# Altium PCB Extender_Remastered_V1.PcbDoc (part 1 of 2)
Units mm, origin at the board's own origin, x right, y up, seen from the top; angles counter-clockwise.
Board outline 188 x 60 mm, 2 copper layers (Top Layer, Bottom Layer); 132 components, 144 nets, 525 pads, 128 vias.
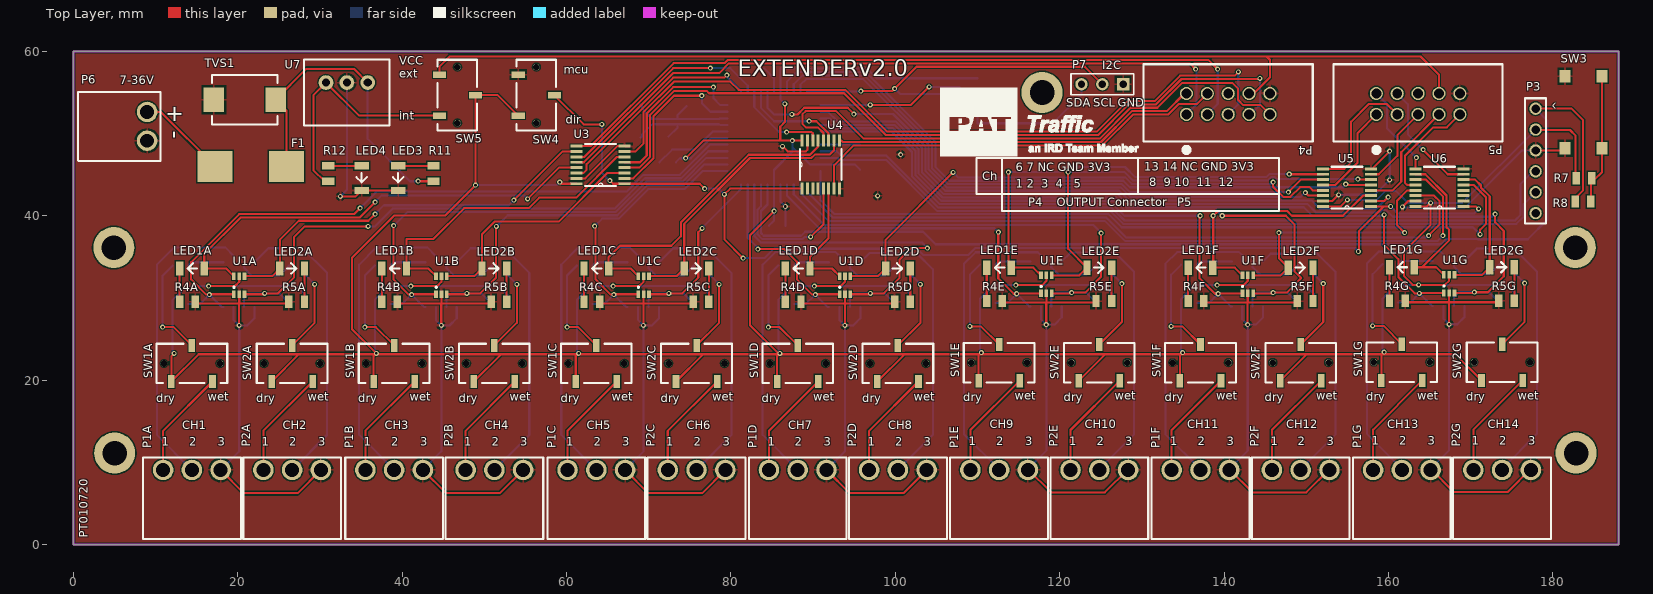
[diagram p0: Top Layer view]
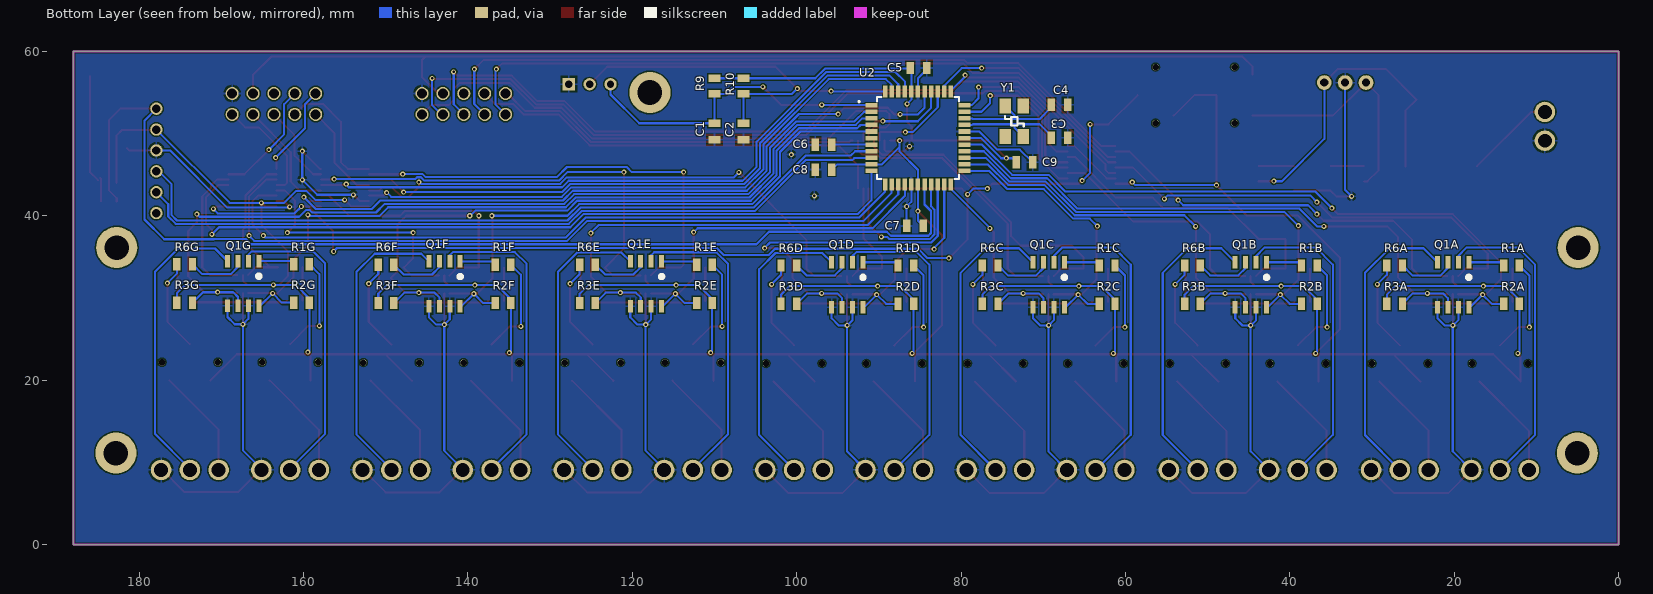
[diagram p1: Bottom Layer view, seen from below]
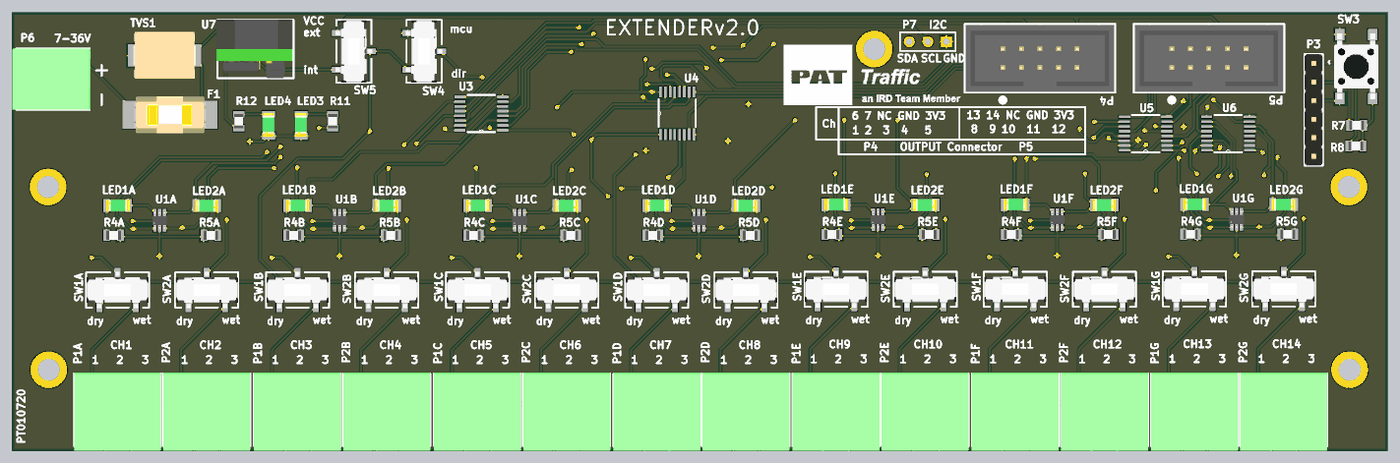
[diagram p3: 3D render of the assembled board from above, using the file's embedded part models]
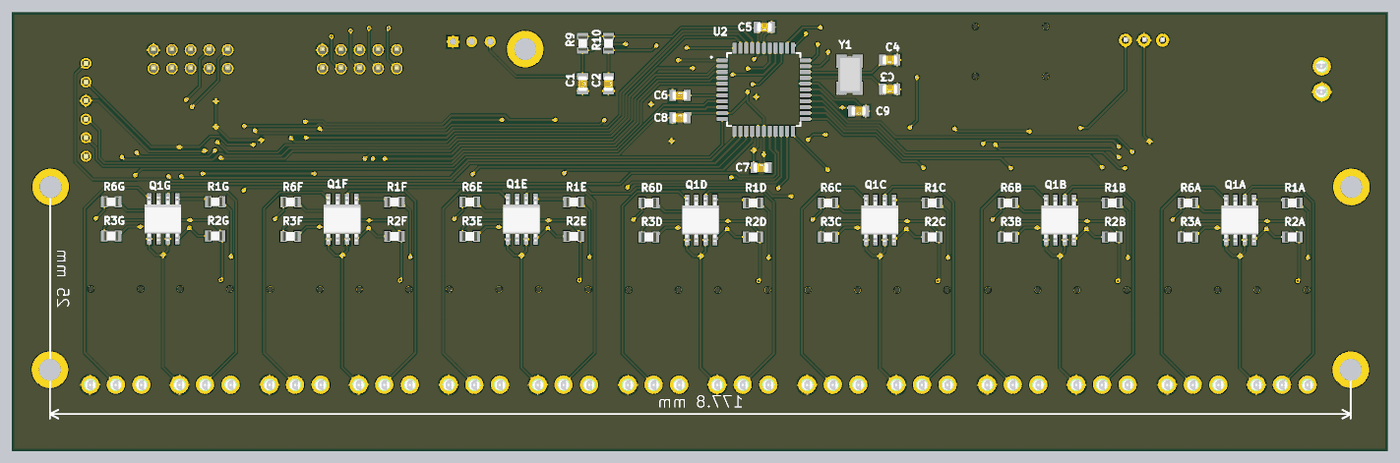
[diagram p4: 3D render of the assembled board from below, using the file's embedded part models]

## Layer stack, top to bottom
Top Solder: solder mask 0.0102, Solder Resist, Dk 3.5
Top Layer: signal copper 0.0356
Dielectric 1: dielectric 0.32, FR-4, Dk 4.8
Bottom Layer: signal copper 0.0356
Bottom Solder: solder mask 0.0102, Solder Resist, Dk 3.5

## Board outline
0,0 188,0 188,60 0,60

## Design rules (kind name [scope] priority, off if disabled: settings)
Clearance [All] p1: gap=0.152
HoleSize [All] p1: absolutevalues=TRUE maxlimit=6.3 minlimit=0.3 maxpercent=80.000 minpercent=20.000
MinimumAnnularRing [All] p1: minimumring=0.152
MinimumSolderMaskSliver [All] p1: minsoldermaskwidth=0.1
PolygonConnect [All] p1: connectstyle=Relief reliefconductorwidth=0.254 reliefentries=4 polygonreliefangle="90 Angle" airgapwidth=0.254
RoutingVias [All] p1: holewidth=0.305 width=0.508 viastyle="Through Hole" minholewidth=0.3 minwidth=0.45 maxholewidth=6.3 maxwidth=6.45
SilkToSilkClearance [All] p1: silktosilkclearance=0.152
SilkToSolderMaskClearance [IsPad] p1: minsilkscreentomaskgap=0.1 clearancetoexposedcopper=TRUE
SolderMaskExpansion [All] p1: expansion=0.102
Width [All] p1: maxlimit=1 minlimit=0.152 preferedwidth=0.254
26 further rules are at their usual default settings.

## Classes and differential pairs
net class INB[1..7]: INB1 INB2 INB3 INB4 INB5 INB6 INB7
net class IN_INVB[1..7]: IN_INVB1 IN_INVB2 IN_INVB3 IN_INVB4 IN_INVB5 IN_INVB6 IN_INVB7
net class IN_INVA[1..7]: IN_INVA1 IN_INVA2 IN_INVA3 IN_INVA4 IN_INVA5 IN_INVA6 IN_INVA7
net class INB_MCU[1..7]: INB_MCU1 INB_MCU2 INB_MCU3 INB_MCU4 INB_MCU5 INB_MCU6 INB_MCU7
net class INA_MCU[1..7]: INA_MCU1 INA_MCU2 INA_MCU3 INA_MCU4 INA_MCU5 INA_MCU6 INA_MCU7
net class INA[1..7]: INA1 INA2 INA3 INA4 INA5 INA6 INA7
channel class Dual_opto_input: D_IN1 D_IN2 D_IN3 D_IN4 D_IN5 D_IN6 D_IN7
component class PWR_source: F1 LED3 LED4 P6 R11 R12 SW5 TVS1 U7
component class OUT_CONN: P4 P5 SW4 U3 U4 U5 U6
component class MCU: C1 C2 C3 C4 C5 C6 C7 C8 C9 P3 P7 R7 R8 R9 R10 SW3 U2 Y1
component class D_IN7: LED1G LED2G P1G P2G Q1G R1G R2G R3G R4G R5G R6G SW1G SW2G U1G
component class D_IN6: LED1F LED2F P1F P2F Q1F R1F R2F R3F R4F R5F R6F SW1F SW2F U1F
component class D_IN5: LED1E LED2E P1E P2E Q1E R1E R2E R3E R4E R5E R6E SW1E SW2E U1E
component class D_IN4: LED1D LED2D P1D P2D Q1D R1D R2D R3D R4D R5D R6D SW1D SW2D U1D
component class D_IN3: LED1C LED2C P1C P2C Q1C R1C R2C R3C R4C R5C R6C SW1C SW2C U1C
component class D_IN2: LED1B LED2B P1B P2B Q1B R1B R2B R3B R4B R5B R6B SW1B SW2B U1B
component class D_IN1: LED1A LED2A P1A P2A Q1A R1A R2A R3A R4A R5A R6A SW1A SW2A U1A

## Components (designator, comment, footprint, x,y, rotation, side; value= is the part's Value field where it differs from the comment)
C1 "51pF" Capacitor0805 110,50.25 r270 bottom
C2 "51pF" Capacitor0805 106.475,50.25 r270 bottom
C3 "CapacitorSMD" Capacitor0805 68.018,49.499 r0 bottom
C4 "CapacitorSMD" Capacitor0805 68.018,53.499 r0 bottom
C5 "CapacitorSMD" Capacitor0805 85.175,57.975 r0 bottom
C6 "CapacitorSMD" Capacitor0805 96.718,48.649 r180 bottom
C7 "CapacitorSMD" Capacitor0805 85.618,38.774 r180 bottom
C8 "CapacitorSMD" Capacitor0805 96.718,45.599 r180 bottom
C9 "CapacitorSMD" Capacitor0805 72.293,46.499 r0 bottom
F1 "Fuse" FUSEBLOCKSMD 21.6,46 r0 top
LED1A "IN1" SMD1206 14.425,33.586 r180 top (schematic designator LED1)
LED1B "IN1" SMD1206 39.025,33.586 r180 top (schematic designator LED1)
LED1C "IN1" SMD1206 63.625,33.586 r180 top (schematic designator LED1)
LED1D "IN1" SMD1206 88.125,33.586 r180 top (schematic designator LED1)
LED1E "IN1" SMD1206 112.625,33.686 r180 top (schematic designator LED1)
LED1F "IN1" SMD1206 137.125,33.686 r180 top (schematic designator LED1)
LED1G "IN1" SMD1206 161.625,33.732 r180 top (schematic designator LED1)
LED2A "IN2" SMD1206 26.617,33.586 r0 top (schematic designator LED2)
LED2B "IN2" SMD1206 51.217,33.586 r0 top (schematic designator LED2)
LED2C "IN2" SMD1206 75.817,33.586 r0 top (schematic designator LED2)
LED2D "IN2" SMD1206 100.317,33.586 r0 top (schematic designator LED2)
LED2E "IN2" SMD1206 124.817,33.686 r0 top (schematic designator LED2)
LED2F "IN2" SMD1206 149.317,33.686 r0 top (schematic designator LED2)
LED2G "IN2" SMD1206 173.817,33.732 r0 top (schematic designator LED2)
LED3 "Power" SMD1206 39.508,44.575 r270 top
LED4 "+3.3V" SMD1206 35.067,44.575 r270 top
P1A "IN1" TBHDR3P3.5 14.425,9.075 r180 top (schematic designator P1)
P1B "IN1" TBHDR3P3.5 39.025,9.075 r180 top (schematic designator P1)
P1C "IN1" TBHDR3P3.5 63.625,9.075 r180 top (schematic designator P1)
P1D "IN1" TBHDR3P3.5 88.125,9.075 r180 top (schematic designator P1)
P1E "IN1" TBHDR3P3.5 112.625,9.075 r180 top (schematic designator P1)
P1F "IN1" TBHDR3P3.5 137.125,9.075 r180 top (schematic designator P1)
P1G "IN1" TBHDR3P3.5 161.625,9.075 r180 top (schematic designator P1)
P2A "IN2" TBHDR3P3.5 26.617,9.075 r180 top (schematic designator P2)
P2B "IN2" TBHDR3P3.5 51.217,9.075 r180 top (schematic designator P2)
P2C "IN2" TBHDR3P3.5 75.817,9.075 r180 top (schematic designator P2)
P2D "IN2" TBHDR3P3.5 100.317,9.075 r180 top (schematic designator P2)
P2E "IN2" TBHDR3P3.5 124.817,9.075 r180 top (schematic designator P2)
P2F "IN2" TBHDR3P3.5 149.317,9.075 r180 top (schematic designator P2)
P2G "IN2" TBHDR3P3.5 173.817,9.075 r180 top (schematic designator P2)
P3 "ICSP" MALE6PIN 177.9,46.675 r270 top
P4 "CON5x2" TBBTB2x5 140.5,53.6 r0 top
P5 "CON5x2" TBBTB2x5 163.6,53.6 r0 top
P6 "DC" TBHDR2P3.5 8.975,50.875 r90 top
P7 "Header 3" HDR1X3 127.725,56 r180 top
Q1A "MOCD217" SOIC8 20.14,31.614 r270 bottom (schematic designator Q1)
Q1B "MOCD217" SOIC8 44.74,31.614 r270 bottom (schematic designator Q1)
Q1C "MOCD217" SOIC8 69.34,31.614 r270 bottom (schematic designator Q1)
Q1D "MOCD217" SOIC8 93.84,31.614 r270 bottom (schematic designator Q1)
Q1E "MOCD217" SOIC8 118.34,31.714 r270 bottom (schematic designator Q1)
Q1F "MOCD217" SOIC8 142.84,31.714 r270 bottom (schematic designator Q1)
Q1G "MOCD217" SOIC8 167.34,31.76 r270 bottom (schematic designator Q1)
R1A "680" ResistorSMD0805 13.028,33.952 r180 bottom (schematic designator R1)
R1B "680" ResistorSMD0805 37.628,33.952 r180 bottom (schematic designator R1)
R1C "680" ResistorSMD0805 62.228,33.952 r180 bottom (schematic designator R1)
R1D "680" ResistorSMD0805 86.728,33.952 r180 bottom (schematic designator R1)
R1E "680" ResistorSMD0805 111.228,34.052 r180 bottom (schematic designator R1)
R1F "680" ResistorSMD0805 135.728,34.052 r180 bottom (schematic designator R1)
R1G "680" ResistorSMD0805 160.228,34.098 r180 bottom (schematic designator R1)
R2A "680" ResistorSMD0805 13.028,29.277 r0 bottom (schematic designator R2)
R2B "680" ResistorSMD0805 37.628,29.277 r0 bottom (schematic designator R2)
R2C "680" ResistorSMD0805 62.228,29.277 r0 bottom (schematic designator R2)
R2D "680" ResistorSMD0805 86.728,29.277 r0 bottom (schematic designator R2)
R2E "680" ResistorSMD0805 111.228,29.377 r0 bottom (schematic designator R2)
R2F "680" ResistorSMD0805 135.728,29.377 r0 bottom (schematic designator R2)
R2G "680" ResistorSMD0805 160.228,29.423 r0 bottom (schematic designator R2)
R3A "680" ResistorSMD0805 27.252,29.277 r180 bottom (schematic designator R3)
R3B "680" ResistorSMD0805 51.852,29.277 r180 bottom (schematic designator R3)
R3C "680" ResistorSMD0805 76.452,29.277 r180 bottom (schematic designator R3)
R3D "680" ResistorSMD0805 100.952,29.277 r180 bottom (schematic designator R3)
R3E "680" ResistorSMD0805 125.452,29.377 r180 bottom (schematic designator R3)
R3F "680" ResistorSMD0805 149.952,29.377 r180 bottom (schematic designator R3)
R3G "680" ResistorSMD0805 174.452,29.423 r180 bottom (schematic designator R3)
R4A "240" ResistorSMD0805 13.875,29.522 r180 top (schematic designator R4)
R4B "240" ResistorSMD0805 38.475,29.522 r180 top (schematic designator R4)
R4C "240" ResistorSMD0805 63.075,29.522 r180 top (schematic designator R4)
R4D "240" ResistorSMD0805 87.575,29.522 r180 top (schematic designator R4)
R4E "240" ResistorSMD0805 112.075,29.622 r180 top (schematic designator R4)
R4F "240" ResistorSMD0805 136.575,29.622 r180 top (schematic designator R4)
R4G "240" ResistorSMD0805 161.075,29.668 r180 top (schematic designator R4)
R5A "240" ResistorSMD0805 27.167,29.522 r0 top (schematic designator R5)
R5B "240" ResistorSMD0805 51.767,29.522 r0 top (schematic designator R5)
R5C "240" ResistorSMD0805 76.367,29.522 r0 top (schematic designator R5)
R5D "240" ResistorSMD0805 100.867,29.522 r0 top (schematic designator R5)
R5E "240" ResistorSMD0805 125.367,29.622 r0 top (schematic designator R5)
R5F "240" ResistorSMD0805 149.867,29.622 r0 top (schematic designator R5)
R5G "240" ResistorSMD0805 174.367,29.668 r0 top (schematic designator R5)
R6A "680" ResistorSMD0805 27.252,33.952 r0 bottom (schematic designator R6)
R6B "680" ResistorSMD0805 51.852,33.952 r0 bottom (schematic designator R6)
R6C "680" ResistorSMD0805 76.452,33.952 r0 bottom (schematic designator R6)
R6D "680" ResistorSMD0805 100.952,33.952 r0 bottom (schematic designator R6)
R6E "680" ResistorSMD0805 125.452,34.052 r0 bottom (schematic designator R6)
R6F "680" ResistorSMD0805 149.952,34.052 r0 bottom (schematic designator R6)
R6G "680" ResistorSMD0805 174.452,34.098 r0 bottom (schematic designator R6)
R7 "10k" ResistorSMD0805 183.775,44.575 r180 top
R8 "470" ResistorSMD0805 183.675,41.725 r180 top
R9 "4.7k" ResistorSMD0805 110,55.775 r90 bottom
R10 "4.7k" ResistorSMD0805 106.475,55.775 r90 bottom
R11 "4.7k" ResistorSMD0805 43.825,45.125 r270 top
R12 "240" ResistorSMD0805 31,45.125 r270 top
SW1A "SPDT" "SPDT SMD" 14.425,22.029 r0 top (schematic designator SW1)
SW1B "SPDT" "SPDT SMD" 39.025,22.029 r0 top (schematic designator SW1)
SW1C "SPDT" "SPDT SMD" 63.625,22.029 r0 top (schematic designator SW1)
SW1D "SPDT" "SPDT SMD" 88.125,22.029 r0 top (schematic designator SW1)
SW1E "SPDT" "SPDT SMD" 112.625,22.129 r0 top (schematic designator SW1)
SW1F "SPDT" "SPDT SMD" 137.125,22.129 r0 top (schematic designator SW1)
SW1G "SPDT" "SPDT SMD" 161.625,22.175 r0 top (schematic designator SW1)
SW2A "SPDT" "SPDT SMD" 26.617,22.029 r0 top (schematic designator SW2)
SW2B "SPDT" "SPDT SMD" 51.217,22.029 r0 top (schematic designator SW2)
SW2C "SPDT" "SPDT SMD" 75.817,22.029 r0 top (schematic designator SW2)
SW2D "SPDT" "SPDT SMD" 100.317,22.029 r0 top (schematic designator SW2)
SW2E "SPDT" "SPDT SMD" 124.817,22.129 r0 top (schematic designator SW2)
SW2F "SPDT" "SPDT SMD" 149.317,22.129 r0 top (schematic designator SW2)
SW2G "SPDT" "SPDT SMD" 173.817,22.175 r0 top (schematic designator SW2)
SW3 "Tactile Switch" TactileSwitch 183.725,52.6 r90 top
SW4 "SPDT" "SPDT SMD" 56.325,54.675 r270 top
SW5 "SPDT" "SPDT SMD" 46.725,54.675 r270 top
TVS1 "30VDC" Varistor 20.85,54.125 r270 top
U1A "Inverter2x2" Inverter2x2 20.18,31.554 r90 top (schematic designator U1)
U1B "Inverter2x2" Inverter2x2 44.78,31.554 r90 top (schematic designator U1)
U1C "Inverter2x2" Inverter2x2 69.38,31.554 r90 top (schematic designator U1)
U1D "Inverter2x2" Inverter2x2 93.88,31.554 r90 top (schematic designator U1)
U1E "Inverter2x2" Inverter2x2 118.38,31.654 r90 top (schematic designator U1)
U1F "Inverter2x2" Inverter2x2 142.88,31.654 r90 top (schematic designator U1)
U1G "Inverter2x2" Inverter2x2 167.38,31.7 r90 top (schematic designator U1)
U2 "PIC24FJ128GB204-I/PT" QFP80P1200X1200X120-44N 85.243,49.449 r180 bottom
U3 "SN74CBTLV3257PWR" SOP65P640X120-16N 64.15,46.175 r180 top
U4 "SN74CBTLV3257PWR" SOP65P640X120-16N 90.925,46.225 r90 top
U5 "SN74CBTLV3257PWR" SOP65P640X120-16N 154.95,43.425 r180 top
U6 "SN74CBTLV3257PWR" SOP65P640X120-16N 166.225,43.425 r180 top
U7 "Regulator 3.3V" OKI78SR 33.275,56.2 r270 top
Y1 "Crystal" CRYSTALSMDMini 73.518,51.499 r90 bottom

## Footprints (in the part's own frame and the unit in brackets; to place one, negate y for a bottom-side part, rotate by r counter-clockwise, add the part's x,y. Pads: shape width x height; smd on the part's side, far side on the other; paste and mask are expansions set on the pad)
Capacitor0805 [mm]
  rect 0.9x1.5 smd: 1(-1,0) 2(1,0)
  body extent -1.02,-0.63 0.98,0.62, height 0.78
CRYSTALSMDMini [mm]
  rect 1.8x1.4 smd: 1(-1.85,-1.1) 2(1.85,1.1) ""(-1.85,1.1) ""(1.85,-1.1)
  silkscreen extent -0.64,-1.14 0.64,1.14, body extent -2.5,-1.65 2.5,1.55, height 0.9
FUSEBLOCKSMD [mm] "Fuse Block Cartridge SMD"
  rect 4.24x3.81 smd: 1(-4.35,0) 2(4.35,0)
  body extent -4.91,-2.51 4.92,2.52, height 3.81
HDR1X3 [mm] "Connector; Header; 3 Position"
  rect 1.5x1.5 hole 0.9: 1(0,0)
  round 1.5 hole 0.9: 2(2.54,0) 3(5.08,0)
  silkscreen extent -1.27,-1.27 6.35,1.27
Inverter2x2 [mm] "Inversor Lógico 2E2S"
  rect 0.9x0.45 smd: 1(-1.1,0.65) 2(-1.1,0) 3(-1.1,-0.65) 4(1.1,-0.65) 5(1.1,0) 6(1.1,0.65)
  silkscreen extent -0.35,0.54 -0.15,0.73, body extent -1.1,-1 1.1,1, height 1.1
MALE6PIN [mm]
  round 1.5 hole 1.02: 1(-6.35,0) 2(-3.81,0) 3(-1.27,0) 4(1.27,0) 5(3.81,0) 6(6.35,0)
  silkscreen extent -7.62,-1.27 7.62,1.27, body extent -7.62,-1.24 7.62,1.25, height 8.54
OKI78SR [mm] "Regulator DC-DC 3.3V 1.5A"
  round 1.8 hole 1: 1(0,2.54) 2(0,0) 3(0,-2.54)
  silkscreen extent -2.79,-5.2 5.21,5.2, body extent -2.87,-5.33 5.21,5.07, height 16.5
QFP80P1200X1200X120-44N [mm]
  rect 1.47x0.55 smd: 1(-5.67,4) 2(-5.67,3.2) 3(-5.67,2.4) 4(-5.67,1.6) 5(-5.67,0.8) 6(-5.67,0) 7(-5.67,-0.8) 8(-5.67,-1.6) 9(-5.67,-2.4) 10(-5.67,-3.2) 11(-5.67,-4) 23(5.67,-4) 24(5.67,-3.2) 25(5.67,-2.4) 26(5.67,-1.6) 27(5.67,-0.8) 28(5.67,0) 29(5.67,0.8) 30(5.67,1.6) 31(5.67,2.4) 32(5.67,3.2) 33(5.67,4)
  rect 0.55x1.47 smd: 12(-4,-5.67) 13(-3.2,-5.67) 14(-2.4,-5.67) 15(-1.6,-5.67) 16(-0.8,-5.67) 17(0,-5.67) 18(0.8,-5.67) 19(1.6,-5.67) 20(2.4,-5.67) 21(3.2,-5.67) 22(4,-5.67) 34(4,5.67) 35(3.2,5.67) 36(2.4,5.67) 37(1.6,5.67) 38(0.8,5.67) 39(0,5.67) 40(-0.8,5.67) 41(-1.6,5.67) 42(-2.4,5.67) 43(-3.2,5.67) 44(-4,5.67)
  silkscreen extent -7.26,-5 5,5
ResistorSMD0805 [mm]
  rect 0.9x1.5 smd: 1(-0.95,0) 2(0.95,0)
  body extent -1,-0.63 1,0.63, height 0.43
SMD1206 [mm]
  rect 0.9x1.75 smd: 1(1.5,0) 2(-1.5,0)
  silkscreen extent -0.64,-0.64 0.51,0.64, body extent -1.65,-0.84 1.55,0.76, height 1.11
SOIC8 [mm]
  rect 1.52x0.61 smd: 1(-2.732,1.905) 2(-2.732,0.635) 3(-2.732,-0.635) 4(-2.732,-1.905) 5(2.732,-1.905) 6(2.732,-0.635) 7(2.732,0.635) 8(2.732,1.905)
  silkscreen extent -1.09,1.71 -0.69,2.1, body extent -3,-2.54 3,2.46, height 3.33
SOP65P640X120-16N [mil]
  rect 58x14 smd: 1(-115,90) 2(-115,64) 3(-115,38) 4(-115,13) 5(-115,-13) 6(-115,-38) 7(-115,-64) 8(-115,-90) 9(115,-90) 10(115,-64) 11(115,-38) 12(115,-13) 13(115,13) 14(115,38) 15(115,64) 16(115,90)
  silkscreen extent -74,-100 74,100
"SPDT SMD" [mm]
  rect 0.8x1.6 smd: 1(-2.5,-2.2) 2(0,2.2) 3(2.5,-2.2)
  round 0.8 hole 0.8: ""(-3.4,0) ""(3.4,0)
  silkscreen extent -4.3,-2.4 4.3,2.4, body extent -4.25,-2.5 4.25,2.5, height 5.5
TactileSwitch [mm]
  rect 1.55x1.3 smd: 1(-4.375,2.25) 2(4.375,2.25) 3(-4.375,-2.25) 4(4.375,-2.25)
  body extent -4.5,-3 4.5,3, height 4.3
TBBTB2x5 [mm] "Board to Board 2x5 Pitch 2.54mm"
  round 1.6 hole 1.2: 1(-5.08,-1.27) 2(-5.08,1.27) 3(-2.54,-1.27) 4(-2.54,1.27) 5(0,-1.27) 6(0,1.27) 7(2.54,-1.27) 8(2.54,1.27) 9(5.08,-1.27) 10(5.08,1.27)
  silkscreen extent -10.29,-5.89 10.29,4.83, body extent -10.16,-4.42 10.16,4.68, height 9
TBHDR2P3.5 [mm] "Connector Green 2 positions with pitch 3.5mm"
  round 2.5 hole 1.7: 1(-1.75,0) 2(1.75,0)
  silkscreen extent -4.2,-1.65 4.2,8.4, body extent -4.2,-1.78 4.2,8.92, height 7.05
TBHDR3P3.5 [mm] "Connector Green 3 positions with pitch 3.5mm"
  round 2.5 hole 1.7: 1(-3.5,0) 2(0,0) 3(3.5,0)
  silkscreen extent -5.95,-1.52 5.95,8.4, body extent -5.95,-1.65 5.95,9.05, height 7.1
Varistor [mm]
  rect 3x2.5 smd: 1(0,3.75) 2(0,-3.75)
  silkscreen extent -3,-4 3,4, body extent -3.2,-4.25 3.2,4.25, height 3.51

## Part data
C1 C2: library part CapacitorSMD, "Ceramic Capacitor"
C3 C4 C5 C6 C7 C8 C9: "Ceramic Capacitor"
F1: "Fuse 6x25mm"
LED1A LED1B LED1C LED1D LED1E LED1F LED1G LED2A LED2B LED2C LED2D LED2E LED2F LED2G: library part LedSMD, "Discrete Led SMD"
LED3 LED4: library part LedSMD, "Discrete Led SMD 1205 Green"
P1A P1B P1C P1D P1E P1F P1G P2A P2B P2C P2D P2E P2F P2G: library part TBHDR3P3.5, "Connector 3 positions with pitch 3.5mm"
P3: library part PHM1x6P2.54, "Pin Header Male 6 Pins Pitch 2.54mm"
P4 P5: library part PH_5x2
P6: library part TBHDR2P3.5, "Connector 2 positions with pitch 3.5mm"
P7: "Header, 3-Pin"
Q1A Q1B Q1C Q1D Q1E Q1F Q1G: "Optocoupler"
R1A R1B R1C R1D R1E R1F R1G R2A R2B R2C R2D R2E R2F R2G R3A R3B R3C R3D R3E R3F R3G R4A R4B R4C R4D R4E R4F R4G R5A R5B R5C R5D R5E R5F R5G R6A R6B R6C R6D R6E R6F R6G R7 R8 R9 R10 R11 R12: library part ResistorSMD, "Chip Resistor SMD"
SW1A SW1B SW1C SW1D SW1E SW1F SW1G SW2A SW2B SW2C SW2D SW2E SW2F SW2G SW4 SW5: library part SW_SPDT, "200mA 12V"
SW3: "Switch Contact"
TVS1: library part Varistor, "Varistor SMD"
U1A U1B U1C U1D U1E U1F U1G: "Logic Inverter 2 Circuits"
U2: "128KB Flash, 8KB RAM, 16 MIPS, USB OTG, Crypto, 44 TQFP 10x10x1mm TRAY"
U3 U4 U5 U6: "Multiplexer/Demultiplexer 4 x 1:2 16-TSSOP"
U7: library part OKI78SR, "Regulator DC-DC 3.3V 1.5A"
Y1: "Crystal SMD"

## Free pads (board coordinates)
  round 5 hole 3: ""(4.925,36.125) ""(5.025,11.125) ""(117.856,54.991) ""(182.725,36.125) ""(182.825,11.125)

## Via types
v1: diameter 0.61, hole 0.305, Top Layer to Bottom Layer, 128 vias

## Nets (pads, with @x,y where several pads share a name; then routed paths per layer and width w, separated by ;. In a path a pad name is that pad's centre, name@x,y a point inside that pad or via, vN(x,y) a via of type N, cw(c..) or ccw(c..) an arc to the next point about the centre after c; other vN are vias at no path point)
3V3: R12.2 SW5.3 U7.3 | length 29.1
  Top Layer w0.254: R12.2@31,44.175 30.575,44.175 29.2,45.55 29.2,54.665 U7.3@30.735,56.2 34.76,52.175 SW5.3@44.525,52.175
3V3EXT: P4.8 P5.8 SW5.1 | length 132.3
  Top Layer w0.254: SW5.1@44.525,57.175 44.525,58.125 45.775,59.375 145.159,59.375 ; P4.8@143.04,54.87 143.619,54.87 145.58,56.831 145.58,58.954 145.159,59.375 ; P5.8@166.14,54.87 166.14,57.135 163.9,59.375 145.159,59.375
24V: F1.2 R11.2 TVS1.1 U7.1 | length 39.2
  Top Layer w0.254: F1.2@25.95,46 25.95,52.775 TVS1.1@24.6,54.125 28.35,57.875 34.14,57.875 U7.1@35.815,56.2 ; v1(41.95,44.2) 43.8,44.2 R11.2@43.825,44.175
  Bottom Layer w0.254: U7.1@35.815,56.2 35.8,56.185 35.8,49.35 40.95,44.2 v1(41.95,44.2)
CH1A: P4.1 U3.12 | length 86.6
  Top Layer w0.254: U3.12@61.229,46.505 62.105,46.505 72.956,57.356 78.575,57.356 79.751,58.532 135.843,58.532 v1(136.525,57.85)
  Bottom Layer w0.254: P4.1@135.42,52.33 136.65,53.56 136.65,57.725 v1(136.525,57.85)
CH1B: P4.3 U3.9 | length 89.1
  Top Layer w0.254: U3.9@61.229,48.461 62.911,48.461 73.025,58.575 79.219,58.575 79.582,58.938 138.112,58.938 v1(139.2,57.85)
  Bottom Layer w0.254: P4.3@137.96,52.33 139.225,53.595 v1@139.225,57.675 ; v1(139.2,57.85) 139.2,57.7 v1@139.225,57.675 ; v1@139.225,57.975 v1@139.225,57.675
CH2A: P4.5 U3.7 | length 91.6
  Top Layer w0.254: U3.7@67.071,47.801 68.376,47.801 69.356,48.781 69.356,52.607 73.074,56.325 79.925,56.325 80.944,55.306 93.919,55.306 99,50.225 124.5,50.225 128.225,53.95 131.551,53.95 134.651,57.05 141.275,57.05 v1(141.725,57.5)
  Bottom Layer w0.254: P4.5@140.5,52.33 141.725,53.555 v1(141.725,57.5)
CH2B: P4.7 U3.4 | length 94.3
  Top Layer w0.254: U3.4@67.071,45.845 68.845,45.845 70.169,47.168 70.169,52.27 73.083,55.184 77.041,55.184 77.325,54.9 93.75,54.9 98.832,49.819 124.668,49.819 128.393,53.544 131.719,53.544 134.819,56.644 144.269,56.644 v1(144.35,56.725)
  Bottom Layer w0.254: P4.7@143.04,52.33 143.23,52.33 144.35,53.45 v1(144.35,56.725)
CH3A: P4.9 U4.12 | length 68.8
  Top Layer w0.254: U4.12@91.255,49.146 91.255,50.07 90.575,50.75 89.125,50.75 88.7,51.175 88.7,52.35 89.081,52.731 92.794,52.731 96.15,49.375 124.85,49.375 128.612,53.137 131.887,53.137 134.925,56.175 140.975,56.175 141.7,55.45 141.7,54.075 142.315,53.46 144.45,53.46 P4.9@145.58,52.33
CH3B: P4.2 U4.9 | length 44.7
  Top Layer w0.254: U4.9@93.211,49.146 93.446,49.146 93.624,48.969 125.018,48.969 128.781,52.731 133.036,52.731 135.176,54.87 P4.2@135.42,54.87
CH4A: P4.4 U4.7 | length 51.9
  Top Layer w0.254: U4.7@92.551,43.304 92.551,46.151 94.962,48.562 125.187,48.562 128.949,52.324 133.205,52.324 134.455,53.575 136.665,53.575 P4.4@137.96,54.87
CH4B: P5.1 U5.12 | length 12.2
  Top Layer w0.254: U5.12@152.029,43.755 153.555,43.755 156.225,46.425 156.225,50.035 P5.1@158.52,52.33
CH5A: P5.3 U5.9 | length 15.7
  Top Layer w0.254: U5.9@152.029,45.711 154.636,45.711 155.45,46.525 155.45,51.45 157.6,53.6 159.79,53.6 P5.3@161.06,52.33
CH5B: P5.5 U5.7 | length 10.2
  Top Layer w0.254: U5.7@157.871,45.051 158.826,45.051 161.075,47.3 161.075,49.805 P5.5@163.6,52.33
CH6A: P5.7 U5.4 | length 14.2
  Top Layer w0.254: U5.4@157.871,43.095 160.495,43.095 161.55,44.15 161.55,47.74 P5.7@166.14,52.33
CH6B: P5.9 U6.12 | length 13.4
  Top Layer w0.254: U6.12@163.304,43.755 162.245,43.755 162.025,43.975 162.025,47.325 165.45,50.75 167.1,50.75 P5.9@168.68,52.33
CH7A: P5.2 U6.9 | length 11.2
  Top Layer w0.254: U6.9@163.304,45.711 163.304,46.979 v1(163.4,47.075)
  Bottom Layer w0.254: P5.2@158.52,54.87 159.825,53.565 159.825,50.65 v1(163.4,47.075)
CH7B: P5.4 U6.7 | length 14.3
  Top Layer w0.254: v1(164.2,48.05) 167.199,45.051 U6.7@169.146,45.051
  Bottom Layer w0.254: P5.4@161.06,54.87 162.35,53.58 162.35,49.9 v1(164.2,48.05)
GND: C1.2 C2.2 C3.1 C4.1 C5.1 C6.1 C7.1 C8.1 C9.1 LED3.1 LED4.1 P1A.1 P1B.1 P1C.1 P1D.1 P1E.1 P1F.1 P1G.1 P2A.1 P2B.1 P2C.1 P2D.1 P2E.1 P2F.1 P2G.1 P3.3 P4.10 P5.10 P6.1 P7.1 Q1A.5 Q1A.7 Q1B.5 Q1B.7 Q1C.5 Q1C.7 Q1D.5 Q1D.7 Q1E.5 Q1E.7 Q1F.5 Q1F.7 Q1G.5 Q1G.7 R4A.1 R4B.1 R4C.1 R4D.1 R4E.1 R4F.1 R4G.1 R5A.1 R5B.1 R5C.1 R5D.1 R5E.1 R5F.1 R5G.1 SW3.1 SW3.2 SW4.1 TVS1.2 U1A.2 U1B.2 U1C.2 U1D.2 U1E.2 U1F.2 U1G.2 U2.16 U2.29 U2.39 U3.8 U3.15 U4.8 U4.15 U5.8 U5.15 U6.8 U6.15 U7.2 | length 473.9
  Top Layer w0.254: R4A.1@14.825,29.522 15.016,29.331 20.18,29.331 ; P1A.1@17.925,9.075 20.75,6.25 27.292,6.25 P2A.1@30.117,9.075 ; v1(20.162,26.65) 20.162,29.313 20.18,29.331 ; U1A.2@20.18,30.454 20.18,29.331 ; R5A.1@26.217,29.522 26.026,29.331 20.18,29.331 ; v1@32.5,42.325 34.317,42.325 LED4.1@35.067,43.075 LED3.1@39.508,43.075 ; R4B.1@39.425,29.522 39.616,29.331 44.78,29.331 ; P1B.1@42.525,9.075 45.35,6.25 51.892,6.25 P2B.1@54.717,9.075 ; v1(44.762,26.65) 44.762,29.313 44.78,29.331 ; U1B.2@44.78,30.454 44.78,29.331 ; R5B.1@50.817,29.522 50.626,29.331 44.78,29.331 ; U3.15@61.229,44.549 62.274,44.549 66.186,48.461 U3.8@67.071,48.461 ; R4C.1@64.025,29.522 64.216,29.331 69.38,29.331 ; P1C.1@67.125,9.075 69.95,6.25 76.492,6.25 P2C.1@79.317,9.075 ; v1(69.362,26.65) 69.362,29.313 69.38,29.331 ; U1C.2@69.38,30.454 69.38,29.331 ; R5C.1@75.417,29.522 75.226,29.331 69.38,29.331 ; v1(86.275,48.45) 86.894,47.831 89.1,47.831 89.299,48.031 U4.15@89.299,49.146 ; R4D.1@88.525,29.522 88.716,29.331 93.88,29.331 ; P1D.1@91.625,9.075 94.45,6.25 100.992,6.25 P2D.1@103.817,9.075 ; v1(93.862,26.65) 93.862,29.313 93.88,29.331 ; U1D.2@93.88,30.454 93.88,29.331 ; R5D.1@99.917,29.522 99.726,29.331 93.88,29.331 ; R4E.1@113.025,29.622 113.216,29.431 118.38,29.431 ; P1E.1@116.125,9.175 118.95,6.35 125.492,6.35 P2E.1@128.317,9.175 ; v1(118.362,26.75) 118.362,29.413 118.38,29.431 ; U1E.2@118.38,30.554 118.38,29.431 ; R5E.1@124.417,29.622 124.226,29.431 118.38,29.431 ; R4F.1@137.525,29.622 137.716,29.431 142.88,29.431 ; P1F.1@140.625,9.175 143.45,6.35 149.992,6.35 P2F.1@152.817,9.175 ; v1(142.862,26.75) 142.862,29.413 142.88,29.431 ; U1F.2@142.88,30.554 142.88,29.431 ; R5F.1@148.917,29.622 148.726,29.431 142.88,29.431 ; U5.15@152.029,41.799 153.174,41.799 v1(153.925,42.55) ; U5.8@157.871,45.711 158.011,45.711 v1(160.15,47.85) ; v1(161.7,41.075) 162.424,41.799 U6.15@163.304,41.799 ; R4G.1@162.025,29.668 162.216,29.477 167.38,29.477 ; P1G.1@165.125,9.221 167.95,6.396 174.492,6.396 P2G.1@177.317,9.221 ; v1(167.362,26.796) 167.362,29.459 167.38,29.477 ; U1G.2@167.38,30.6 167.38,29.477 ; R5G.1@173.417,29.668 173.226,29.477 167.38,29.477 ; P3.3@177.9,47.945 181.195,47.945 SW3.1@181.475,48.225
  Bottom Layer w0.254: P1A.1@17.925,9.075 20.18,11.33 v1@20.18,26.65 ; Q1A.7@19.505,28.882 19.505,27.307 v1(20.162,26.65) v1@20.18,26.65 ; Q1A.5@22.045,28.882 22.045,27.533 21.162,26.65 v1@20.18,26.65 ; v1(32.5,42.35) 33.275,43.125 U7.2@33.275,56.2 ; P1B.1@42.525,9.075 44.78,11.33 v1@44.78,26.65 ; Q1B.7@44.105,28.882 44.105,27.307 v1(44.762,26.65) v1@44.78,26.65 ; Q1B.5@46.645,28.882 46.645,27.533 45.762,26.65 v1@44.78,26.65 ; P1C.1@67.125,9.075 69.38,11.33 v1@69.38,26.65 ; Q1C.7@68.705,28.882 68.705,27.307 v1(69.362,26.65) v1@69.38,26.65 ; Q1C.5@71.245,28.882 71.245,27.533 70.362,26.65 v1@69.38,26.65 ; C9.1@71.293,46.499 72.843,48.049 75.593,48.049 77.793,50.249 U2.29@79.573,50.249 ; C5.1@84.053,57.928 85.243,56.738 U2.39@85.243,55.119 ; U2.16@86.043,43.779 86.043,41.7 v1(86.618,41.125) C7.1@86.618,38.774 ; P1D.1@91.625,9.075 93.88,11.33 v1@93.88,26.65 ; Q1D.7@93.205,28.882 93.205,27.307 v1(93.862,26.65) v1@93.88,26.65 ; Q1D.5@95.745,28.882 95.745,27.533 94.862,26.65 v1@93.88,26.65 ; P1E.1@116.125,9.175 118.38,11.43 v1@118.38,26.75 ; Q1E.7@117.705,28.982 117.705,27.407 v1(118.362,26.75) v1@118.38,26.75 ; Q1E.5@120.245,28.982 120.245,27.633 119.362,26.75 v1@118.38,26.75 ; P1F.1@140.625,9.175 142.88,11.43 v1@142.88,26.75 ; Q1F.7@142.205,28.982 142.205,27.407 v1(142.862,26.75) v1@142.88,26.75 ; Q1F.5@144.745,28.982 144.745,27.633 143.862,26.75 v1@142.88,26.75 ; v1(153.925,42.55) 158.325,42.55 v1(160.15,44.375) v1(160.15,47.85) ; v1(161.7,41.075) 161.784,40.991 169.266,40.991 176.22,47.945 P3.3@177.9,47.945 ; P1G.1@165.125,9.221 167.38,11.476 v1@167.38,26.796 ; Q1G.7@166.705,29.028 166.705,27.453 v1(167.362,26.796) v1@167.38,26.796 ; Q1G.5@169.245,29.028 169.245,27.679 168.362,26.796 v1@167.38,26.796
  other v1: 97.85,42.425 100.65,47.45
I2C-SCL: C2.1 P7.2 R10.1 U2.44 | length 48.5
  Top Layer w0.254: v1(95.8,55.175) 99.625,55.175 v1(99.925,55.475) 102.576,58.126 123.059,58.126 P7.2@125.185,56
  Bottom Layer w0.254: U2.44@89.243,55.119 95.744,55.119 v1(95.8,55.175) ; v1(99.925,55.475) 100.575,54.825 R10.1@106.475,54.825 C2.1@106.475,51.25
I2C-SDA: C1.1 P7.3 R9.1 U2.1 | length 39.3
  Top Layer w0.254: v1(96.95,53.475) 101.9,53.475 v1(104.1,55.675)
  Bottom Layer w0.254: U2.1@90.913,53.449 96.924,53.449 v1(96.95,53.475) ; v1(104.1,55.675) 107.775,55.675 108.625,54.825 R9.1@110,54.825 C1.1@110,51.25 119.15,51.25 122.645,54.745 P7.3@122.645,56
IN_INVA1: LED1A.2 U1A.6 U3.13 | length 55.8
  Top Layer w0.254: U1A.6@19.53,32.654 18.598,33.586 LED1A.2@15.925,33.586 15.925,35.375 20.343,39.794 34.844,39.794 v1(36.7,41.65) ; v1(55.275,42.05) 59.07,45.845 U3.13@61.229,45.845
  Bottom Layer w0.254: v1(36.7,41.65) 37.534,42.484 54.841,42.484 v1(55.275,42.05)
IN_INVA2: LED1B.2 U1B.6 U3.6 | length 38.3
  Top Layer w0.254: U1B.6@44.13,32.654 43.198,33.586 LED1B.2@40.525,33.586 40.525,37.175 43.8,37.175 47.55,40.925 55.4,40.925 56.675,42.2 61.175,42.2 66.115,47.14 U3.6@67.071,47.14
IN_INVA3: LED1C.2 U1C.6 U4.13 | length 38.1
  Top Layer w0.254: U1C.6@68.73,32.654 67.798,33.586 LED1C.2@65.125,33.586 65.125,34.975 66.5,36.35 72.75,36.35 73.911,37.511 73.911,39.185 82.15,47.425 89.625,47.425 90.595,48.395 U4.13@90.595,49.146
IN_INVA4: LED1D.2 U1D.6 U4.6 | length 14.6
  Top Layer w0.254: U4.6@91.89,43.304 91.89,37.29 89.625,35.025 LED1D.2@89.625,33.586 92.298,33.586 U1D.6@93.23,32.654
IN_INVA5: LED1E.2 U1E.6 U5.10 | length 55
  Top Layer w0.254: v1(113.75,45.3) 113.75,34.061 LED1E.2@114.125,33.686 116.798,33.686 U1E.6@117.73,32.754 ; v1(147.926,45.051) U5.10@152.029,45.051
  Bottom Layer w0.254: v1(113.75,45.3) 120.05,45.3 120.675,45.925 127.95,45.925 129.175,44.7 145.149,44.7 145.54,45.091 147.885,45.091 v1(147.926,45.051)
IN_INVA6: LED1F.2 U1F.6 U5.3 | length 31
  Top Layer w0.254: U1F.6@142.23,32.754 141.298,33.686 LED1F.2@138.625,33.686 138.675,33.736 v1(138.675,40) 139.259,40.584 147.666,40.584 148.25,40 154.45,40 156.91,42.46 U5.3@157.871,42.46
IN_INVA7: LED1G.2 U1G.6 U6.10 | length 19
  Top Layer w0.254: LED1G.2@163.125,33.732 164.082,33.732 ; U6.10@163.304,45.051 164.474,45.051 167.056,42.468 167.056,38.6 167.375,38.281 167.375,37.025 164.082,33.732 ; U1G.6@166.73,32.8 165.798,33.732 164.082,33.732
IN_INVB1: LED2A.2 U1A.4 U3.10 | length 48.7
  Top Layer w0.254: U1A.4@20.83,32.654 24.185,32.654 LED2A.2@25.117,33.586 25.117,37.067 27.437,39.387 35.887,39.387 v1(36.7,40.2) ; v1(53.6,41.9) 59.501,47.801 U3.10@61.229,47.801
  Bottom Layer w0.254: v1(36.7,40.2) 37.781,41.281 52.981,41.281 v1(53.6,41.9)
IN_INVB2: LED2B.2 U1B.4 U3.3 | length 29.3
  Top Layer w0.254: U1B.4@45.43,32.654 48.785,32.654 LED2B.2@49.717,33.586 49.717,37.768 51.233,39.284 59.059,39.284 64.985,45.21 U3.3@67.071,45.21
IN_INVB3: LED2C.2 U1C.4 U4.10 | length 33.2
  Top Layer w0.254: U1C.4@70.03,32.654 73.385,32.654 LED2C.2@74.317,33.586 74.317,39.017 82.319,47.019 89.793,47.019 90.218,47.444 91.994,47.444 92.551,48.001 U4.10@92.551,49.146
IN_INVB4: LED2D.2 U1D.4 U5.13 | length 67.2
  Top Layer w0.254: U1D.4@94.53,32.654 97.885,32.654 LED2D.2@98.817,33.586 98.817,37.067 v1(107.02,45.27) ; v1(145.95,44.1) 145.95,43.55 147.209,42.291 148.067,42.291 149.251,43.475 150.4,43.475 150.78,43.095 U5.13@152.029,43.095
  Bottom Layer w0.254: v1(107.02,45.27) 107.625,44.665 127.961,44.665 128.754,43.871 145.721,43.871 v1(145.95,44.1)
IN_INVB5: LED2E.2 U1E.4 U5.6 | length 54.8
  Top Layer w0.254: U1E.4@119.03,32.754 122.385,32.754 LED2E.2@123.317,33.686 121.025,35.978 v1(121.025,45.3) ; v1(156.275,44.45) 156.335,44.39 U5.6@157.871,44.39
  Bottom Layer w0.254: v1(121.025,45.3) 127.9,45.3 128.923,44.278 145.301,44.278 145.708,44.684 146.192,44.684 146.426,44.45 v1(156.275,44.45)
IN_INVB6: LED2F.2 U1F.4 U6.13 | length 31.9
  Top Layer w0.254: U1F.4@143.53,32.754 146.885,32.754 LED2F.2@147.817,33.686 146.675,34.828 v1@146.675,38.05 ; v1(161.95,37.95) 161.05,38.85 161.05,41.85 162.295,43.095 U6.13@163.304,43.095
  Bottom Layer w0.254: v1@146.675,38.05 146.775,37.95 v1(161.95,37.95)
  other v1: 146.675,37.95
IN_INVB7: LED2G.2 U1G.4 U6.6 | length 17.5
  Top Layer w0.254: U1G.4@168.03,32.8 171.385,32.8 LED2G.2@172.317,33.732 172.317,42.358 171.25,43.425 171.25,43.68 170.54,44.39 U6.6@169.146,44.39
INA1: Q1A.8 R2A.2 U1A.1 U2.27 | length 84.6
  Top Layer w0.254: U1A.1@19.53,30.454 16.603,30.454 v1(16.56,30.411) 16.189,30.411 14.325,32.275 14.325,34.35 20.175,40.2 34.15,40.2 v1(34.875,40.925)
  Bottom Layer w0.254: R2A.2@13.978,29.277 15.426,29.277 v1(16.56,30.411) 18.089,28.882 Q1A.8@18.235,28.882 ; v1(34.875,40.925) 36.875,42.925 67.3,42.925 69.343,44.968 73.775,44.968 77.456,48.649 U2.27@79.573,48.649
INA2: Q1B.8 R2B.2 U1B.1 U2.25 | length 66.9
  Top Layer w0.254: 38.925,37.375 38.925,32.275 ; v1(38.975,38.8) 38.925,38.75 38.925,32.275 ; U1B.1@44.13,30.454 41.203,30.454 v1(41.16,30.411) 40.789,30.411 38.925,32.275
  Bottom Layer w0.254: R2B.2@38.578,29.277 40.026,29.277 v1(41.16,30.411) 42.689,28.882 Q1B.8@42.835,28.882 ; v1@39.05,38.825 40.694,40.469 66.018,40.469 69.705,44.155 74.112,44.155 77.005,47.049 U2.25@79.573,47.049
INA3: Q1C.8 R2C.2 U1C.1 U2.23 | length 41.9
  Top Layer w0.254: v1(63.425,38.75) 63.525,38.65 63.525,32.275 ; 63.525,37.375 63.525,32.275 ; U1C.1@68.73,30.454 65.803,30.454 v1(65.76,30.411) 65.389,30.411 63.525,32.275
  Bottom Layer w0.254: R2C.2@63.178,29.277 64.626,29.277 v1(65.76,30.411) 67.289,28.882 Q1C.8@67.435,28.882 ; v1(63.425,38.75) 64.331,39.656 66.355,39.656 69.945,43.246 74.352,43.246 76.555,45.449 U2.23@79.573,45.449
INA4: Q1D.8 R2D.2 U1D.1 U2.21 | length 27.2
  Top Layer w0.254: v1(83.275,35.95) 86.5,35.95 88.025,34.425 88.025,32.275 89.889,30.411 v1(90.26,30.411) 90.303,30.454 U1D.1@93.23,30.454
  Bottom Layer w0.254: U2.21@82.043,43.779 82.043,37.307 v1@83.375,35.975 ; R2D.2@87.678,29.277 89.126,29.277 v1(90.26,30.411) 91.789,28.882 Q1D.8@91.935,28.882
INA5: Q1E.8 R2E.2 U1E.1 U2.15 | length 45.9
  Top Layer w0.254: v1(112.525,38) 112.525,32.375 114.389,30.511 v1(114.76,30.511) 114.803,30.554 U1E.1@117.73,30.554
  Bottom Layer w0.254: U2.15@86.843,43.779 86.843,42.4 90.768,38.475 112.05,38.475 v1(112.525,38) ; R2E.2@112.178,29.377 113.626,29.377 v1(114.76,30.511) 116.289,28.982 Q1E.8@116.435,28.982